# Altium PCB PCB_WallSwitch_Core.PcbDoc (part 2 of 2)
Units mm, origin at the board's own origin, x right, y up, seen from the top; angles counter-clockwise.
Board outline 41 x 41 mm, 4 copper layers (Top Layer, Ground Plane, Power Plane, Bottom Layer), stack 1.57 mm thick; 34 components, 47 nets, 196 pads, 64 vias.
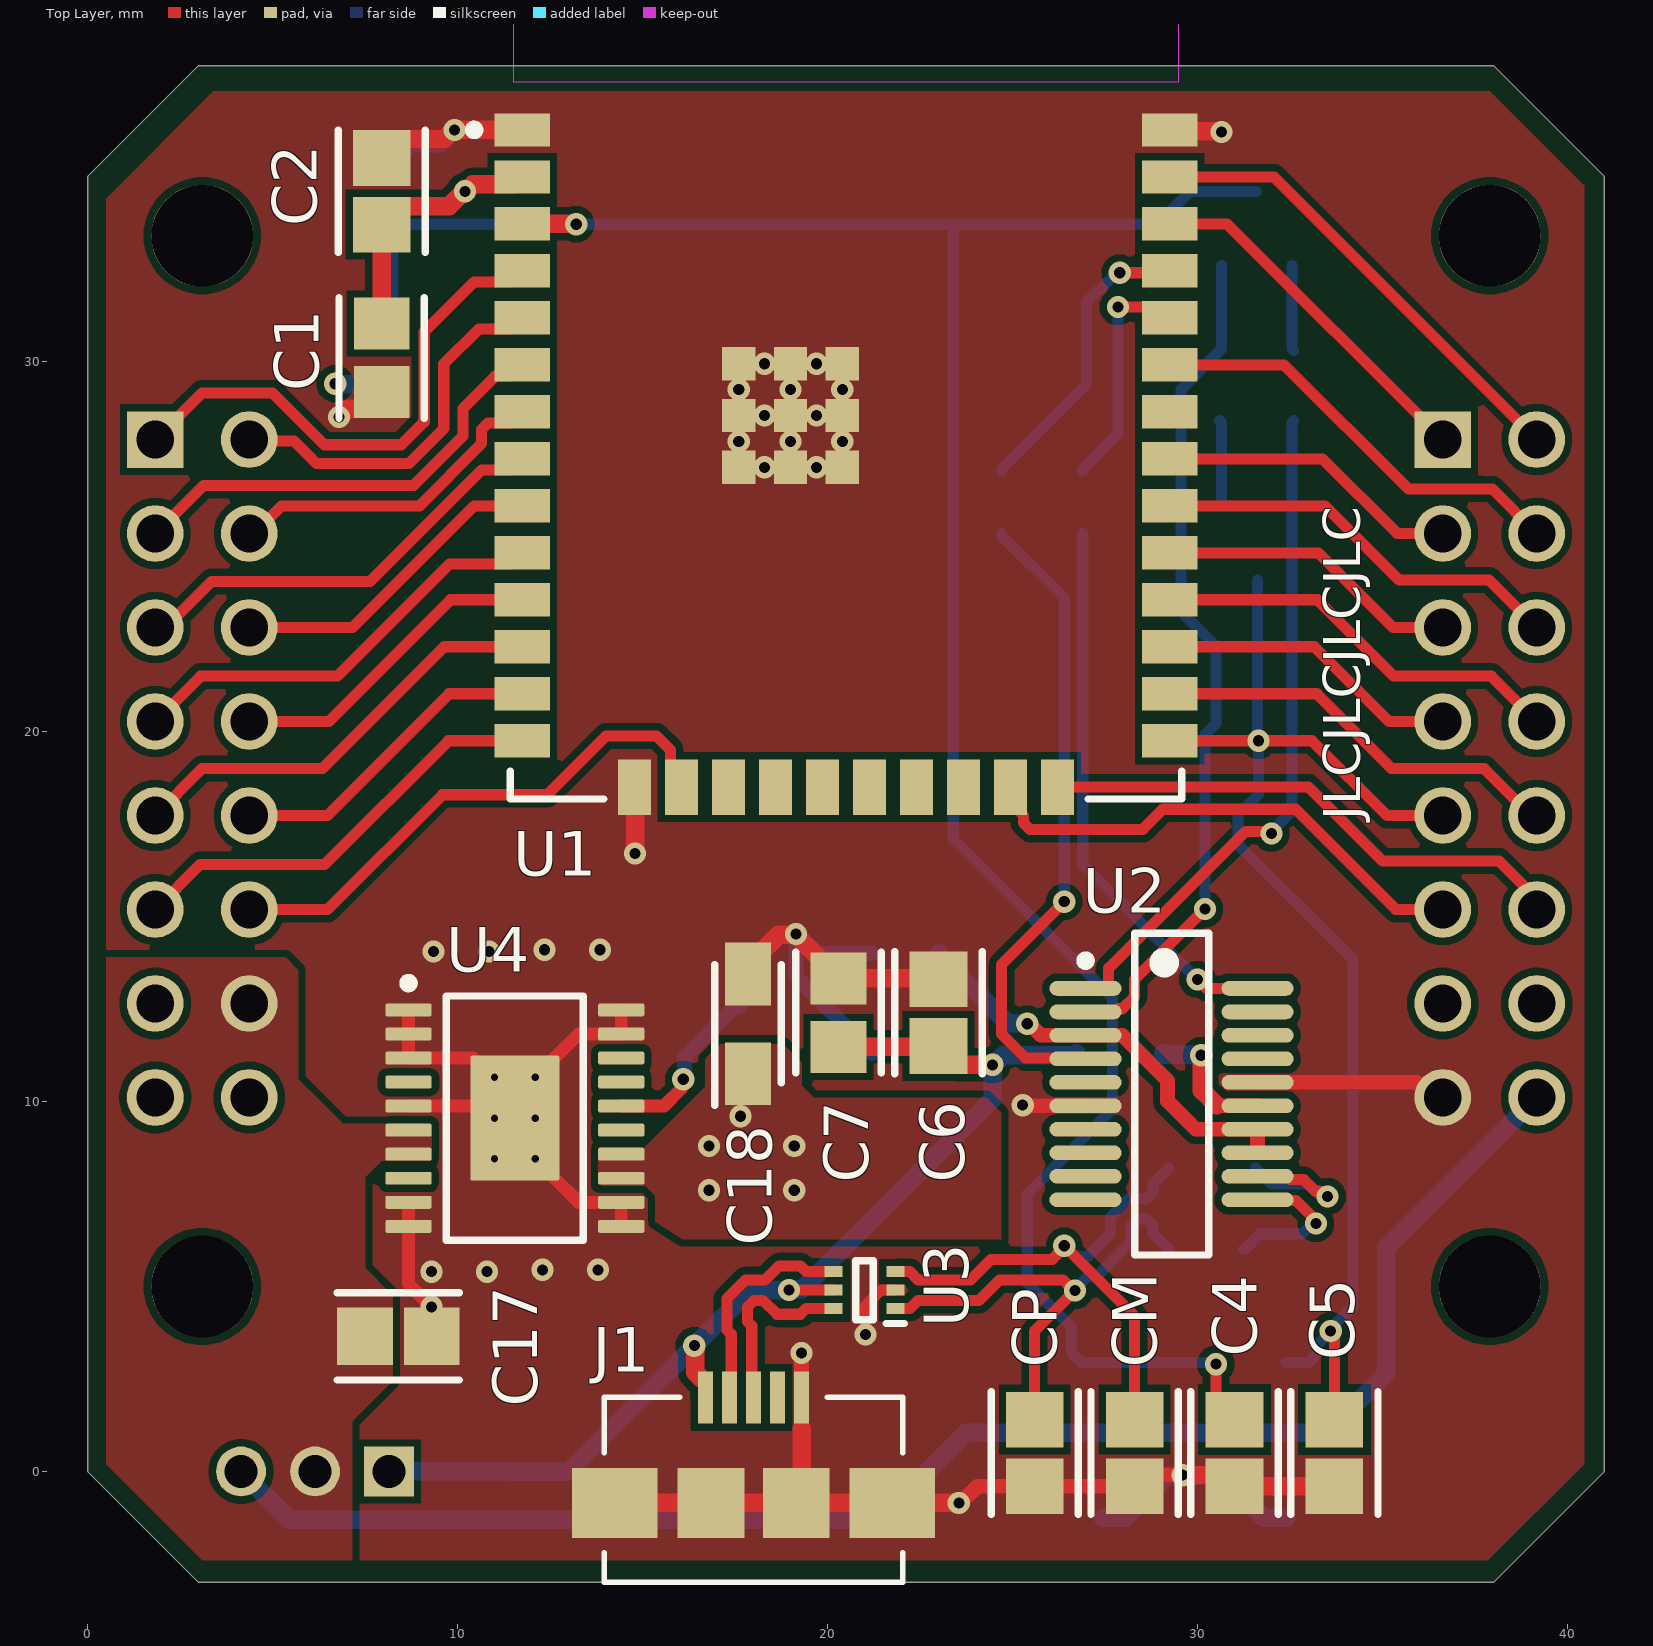
[diagram p0: Top Layer view]

## Via types
v1: diameter 0.6, hole 0.3, Top Layer to Bottom Layer, 46 vias
v2: diameter 0.6, hole 0.3, Top Layer to Bottom Layer, tented bottom, 12 vias
v3: diameter 0.5, hole 0.2, Top Layer to Bottom Layer, 6 vias

## Nets (pads, with @x,y where several pads share a name; then routed paths per layer and width w, separated by ;. In a path a pad name is that pad's centre, name@x,y a point inside that pad or via, vN(x,y) a via of type N, cw(c..) or ccw(c..) an arc to the next point about the centre after c; other vN are vias at no path point) (continued)
NetQ1_1: Q1.1 R5.2 | length 2.3
  Bottom Layer w0.3: Q1.1 32.55,30.35 R5.2
NetQ2_1: Q2.1 R6.2 | length 2.3
  Bottom Layer w0.3: R6.2 30.65,28.35 Q2.1
NetR12_2: R12.2 U4.16 | length 4.8
  Top Layer w0.35: U4.16 15.575,9.875 16.052,10.352 16.052,10.552 v1(16.1,10.6)
  Bottom Layer w0.4: v1(16.1,10.6) 16.138,10.638 16.138,11.213 17.5,12.575 R12.2
RTS: Q1.2 R6.1 U2.2 | length 23
  Top Layer w0.3: U2.2 27.777,12.422 27.862,12.508 27.978,12.508 28.3,12.83 28.3,13.3 v1(30.2,15.2)
  Bottom Layer w0.3: v1(30.2,15.2) 30.2,19.916 30.5,20.216 30.5,22.3 29.55,23.25 29.55,29.25 R6.1 30.65,30.35 Q1.2
RXD_0: R3.2 U2.4 | length 17.5
  Top Layer w0.3: v1(26.4,15.4) 24.7,13.7 24.7,11.819 25.348,11.172 26.956,11.172 U2.4
  Bottom Layer w0.3: R3.2 24.7,25.302 26.4,23.602 v1(26.4,15.4)
RXD_1: R3.1 U1.35 | length 8.1
  Top Layer w0.3: v1(27.9,32.4) 29.2,32.4 U1.35
  Bottom Layer w0.3: R3.1 24.7,27.098 27,29.398 27,31.602 27.316,31.918 27.337,31.918 27.819,32.4 v1(27.9,32.4)
SPI_CLK: P2.06 U1.30 | length 11.3
  Top Layer w0.3: U1.30 33.45,26.1 35.45,24.1 37.88,24.1 P2.06
SPI_CS: P2.05 U1.29 | length 8.2
  Top Layer w0.3: U1.29 33.27,24.83 35.29,22.81 P2.05
SPI_MISO: P2.03 U1.31 | length 8.2
  Top Layer w0.3: U1.31 33.38,27.37 35.4,25.35 P2.03
SPI_MOSI: P2.02 U1.37 | length 12.9
  Top Layer w0.3: U1.37 32.07,34.99 P2.02
TXD_0: R2.2 U2.20 | length 15.1
  Top Layer w0.3: v1(30,13.3) 30.242,13.057 U2.20
  Bottom Layer w0.3: R2.2 26.9,16.4 v1(30,13.3)
TXD_1: R2.1 U1.34 | length 6.3
  Top Layer w0.3: v1@27.854,31.475 28.955,31.475 U1.34
  Bottom Layer w0.3: R2.1 26.9,27.098 27.85,28.048 v1(27.85,31.475)
USB_D0_N: J1.2 U3.4 | length 6.1
  Top Layer w0.3: J1.2 17.398,2.048 17.398,3.708 17.28,3.827 17.28,4.677 17.78,5.177 18.312,5.177 18.691,5.556 19.232,5.556 19.239,5.55 19.275,5.55 19.425,5.4 U3.4
USB_D0_P: J1.3 U3.6 | length 5.1
  Top Layer w0.3: J1.3 17.952,2.048 17.952,3.938 17.834,4.056 17.834,4.447 18.009,4.623 18.258,4.623 18.631,4.25 19.275,4.25 19.425,4.4 U3.6
USB_D1_N: CM.1 RDM.1 U3.3 | length 14.9
  Top Layer w0.3: U3.3 22.225,5.4 22.448,5.177 23.862,5.177 24.414,5.73 26.074,5.73 26.4,6.056 v1(26.4,6.1) 28.3,4.2 CM.1
  Bottom Layer w0.3: v1(26.4,6.1) 26.44,6.1 26.726,5.815 27.034,5.815 27.646,6.427 27.646,6.877 28.146,7.377 28.624,7.377 28.8,7.553 28.8,7.775 RDM.1
USB_D1_P: CP.1 RDP.1 U3.1 | length 13.3
  Top Layer w0.3: U3.1 22.225,4.4 22.448,4.623 24.091,4.623 24.644,5.176 26.365,5.176 26.641,4.9 26.681,4.9 v1(26.69,4.89) 25.6,3.8 CP.1
  Bottom Layer w0.3: v1(26.69,4.89) 26.69,4.935 27.016,5.261 27.263,5.261 28.2,6.197 28.2,6.647 28.376,6.823 28.624,6.823 28.8,6.647 28.8,6.425 RDP.1
USB_D_N: RDM.2 U2.12 | length 4.4
  Top Layer w0.3: U2.12 32.427,7.977 32.512,7.892 32.872,7.892 33.192,7.573 33.297,7.573 33.434,7.435 v1(33.515,7.435)
  Bottom Layer w0.3: RDM.2 32,7.775 32.994,7.775 33.277,7.493 33.458,7.493 v1(33.515,7.435)
USB_D_P: RDP.2 U2.11 | length 4.1
  Top Layer w0.3: U2.11 31.644,7.323 32.658,7.323 33.2,6.781 v1(33.2,6.7)
  Bottom Layer w0.3: RDP.2@31.251,6 31.267,6 31.692,6.425 32.844,6.425 33.119,6.7 v1(33.2,6.7)
USB_VBUS: C6.1 C7.1 C8.1 FB1.1 J1.1 J2.1 U3.5 | length 32.6
  Top Layer w0.3: v1(18.962,4.903) 18.965,4.9 U3.5
  Top Layer w0.4: J1.1@16.574,2.526 16.6,2.5 16.7,2.5 J1.1
  Top Layer w0.5: v1(16.4,3.4) 16.419,3.381 16.419,2.681 J1.1@16.574,2.526 ; C7.1 22.975,11.474 C6.1 23.502,10.997 24.456,10.997 v1(24.462,10.991)
  Bottom Layer w0.5: J2.1 11.4,0 11.4,-0.012 12.988,-0.012 v1(16.4,3.4) 17.903,4.903 v1(18.962,4.903) ; v1@18.919,4.919 19.319,4.919 24.462,10.062 v1(24.462,10.991) ; C8.1 23.31,10.991 v1(24.462,10.991) ; FB1.1 26.675,11.25 24.748,11.25 24.489,10.991 v1(24.462,10.991)
pads on no net: J1.4 U1.17 U1.18 U1.19 U1.20 U1.21 U1.22 U1.32 U2.5 U2.7 U2.8 U2.9 U2.10 U2.17 U2.18 U2.19 U4.4 U4.8 U4.15 U4.17 U4.18

## Polygon pours and split planes (outlines as drawn)
GND on Top Layer "GND_L01_P003" (solid, remove dead copper, pour order 3): 0.5,34.4 3.4,37.3 37.9,37.3 40.45,34.75 40.45,0.2 37.85,-2.4 3.1,-2.4 0.5,0.2
3V3 on Top Layer "3V3_L01_P002" (solid, pour order 2): 19.3,10.425 19.6,10.125 19.6,10.1 24.3,10.1 24.7,9.7 24.7,6.275 16.095,6.275 15.348,6.748 15.35,7.45 15.072,7.728 13.8,7.728 13.8,8.75 15.05,8.75 16.7,10.4 16.7,11.15 17.1,11.55 18.8,11.55 19.3,11.05
5V on Top Layer "5V_L01_P006" (solid, pour order 6): 7.15,-2.4 6.85,-2.4 3.1,-2.4 0.5,0.2 0.5,13.9 5.35,13.9 5.7,13.55 5.7,10.6 6.9,9.4 9.3,9.4 9.3,8.4 7.95,8.4 7.5,7.95 7.5,5.5 8.25,4.75 8.25,2.45 7.15,1.35
GND on Bottom Layer "GND_L04_P004" (solid, remove dead copper, pour order 4): 3.45,37.2 37.95,37.2 40.5,34.65 40.5,0.2 37.85,-2.45 3.15,-2.45 0.5,0.2 0.5,34.25
GND on Ground Plane "GND_L02_P007" (solid, remove dead copper, pour order 7): 0.5,34.4 3.4,37.3 37.9,37.3 40.45,34.75 40.45,0.2 37.85,-2.4 3.1,-2.4 0.5,0.2
3V3 on Power Plane "3V3_L03_P009" (solid, remove dead copper, pour order 9): 13.9,8.95 13.95,8.95 15.9,7 20.4,7 31.1,7 35.604,11.504 37.416,11.504 37.796,11.884 37.796,13.404 37.3,13.9 21,13.9 12.2,22.7 12.2,34.5 11.3,35.4 10,35.4 5.8,31.2 5.8,19.9 5,19.1 1,19.1 0.6,18.7 0.6,11.4 13.9,11.4
5V on Power Plane "5V_L03_P011" (solid, pour order 11): 3.2,13.8 6.1,13.8 8.5,11.4 8.5,3.7 10.1,2.1 33.1,2.1 35.4,4.4 35.4,10.5 36.2,11.3 37.5,11.3 38,11.8 38,13.4 38.4,13.8 40.4,13.8 40.4,0.5 37.7,-2.2 5.4,-2.2 5.3,-2.1 5.3,1.4 6,2.1 6,10.7 5.3,11.4 3.2,11.4
5VEXT on Power Plane "5VEXT_L03_P010" (solid, pour order 10): 3,11.2 4.9,11.2 5.6,10.5 5.6,2.3 5,1.7 5,-1.1 2.8,-1.1 1,0.7 1,8.1 1.9,8.1 3,9.2

## Silkscreen, mask and mechanical layers (free items; w line width, h text height)
Top Overlay:
  text "JLCJLCJLCJLC" at 34.4,17.6 h1 r90
Bottom Overlay:
  lines w0.2: 20,36.5 20.5,37 ; 20.5,35.4 20.5,37 ; 21,36.5 20.5,37
  text "TOP" at 22.366,33.454 h1.4
  text "Smart IoT Wallswitch / CORE Module" at 32.95,18.7 h1.2
  text "EXT" at 6.05,-2.35 h1
  text "USB" at 9.35,-2.35 h1
Top Tenting:
  circle w0.127: c3.1,33.4 r3
  circle w0.127: c3.1,5 r3
  circle w0.127: c37.9,5 r3
  circle w0.127: c37.9,33.4 r3
Dimensions:
  circle w0.254: c20.5,17.5 r37
  circle w0.254: c20.5,17.5 r29
  lines w0.254: -9.5,-9.34 -9.5,46.71 ; -4,-8.98 -4,47.07 ; 3,7.5 38,7.5 ; 3.15,34.5 38.15,34.5 ; 45,-11.86 45,44.19 ; 50.5,-7.9 50.5,44.18 ; 0,0 0,35 3,38 38,38 41,35 41,0 38,-3 3,-3 0,0
Board Shape:
  the board outline again, w0.1

## Dimensions
38,38 to 38,-3 on Dimensions
0,35 to 41,35 on Dimensions